# Altium PCB PCB1.PcbDoc (part 4 of 4)
Units mm, origin at the board's own origin, x right, y up, seen from the top; angles counter-clockwise.
Board outline 120 x 70 mm, 6 copper layers (SIG TOP, GND1, PWR, SIG, GND2, SIG BOT), stack 1.538 mm thick; 355 components, 304 nets, 1156 pads, 166 vias.
Unrouted connection lines stored in the file: 534.
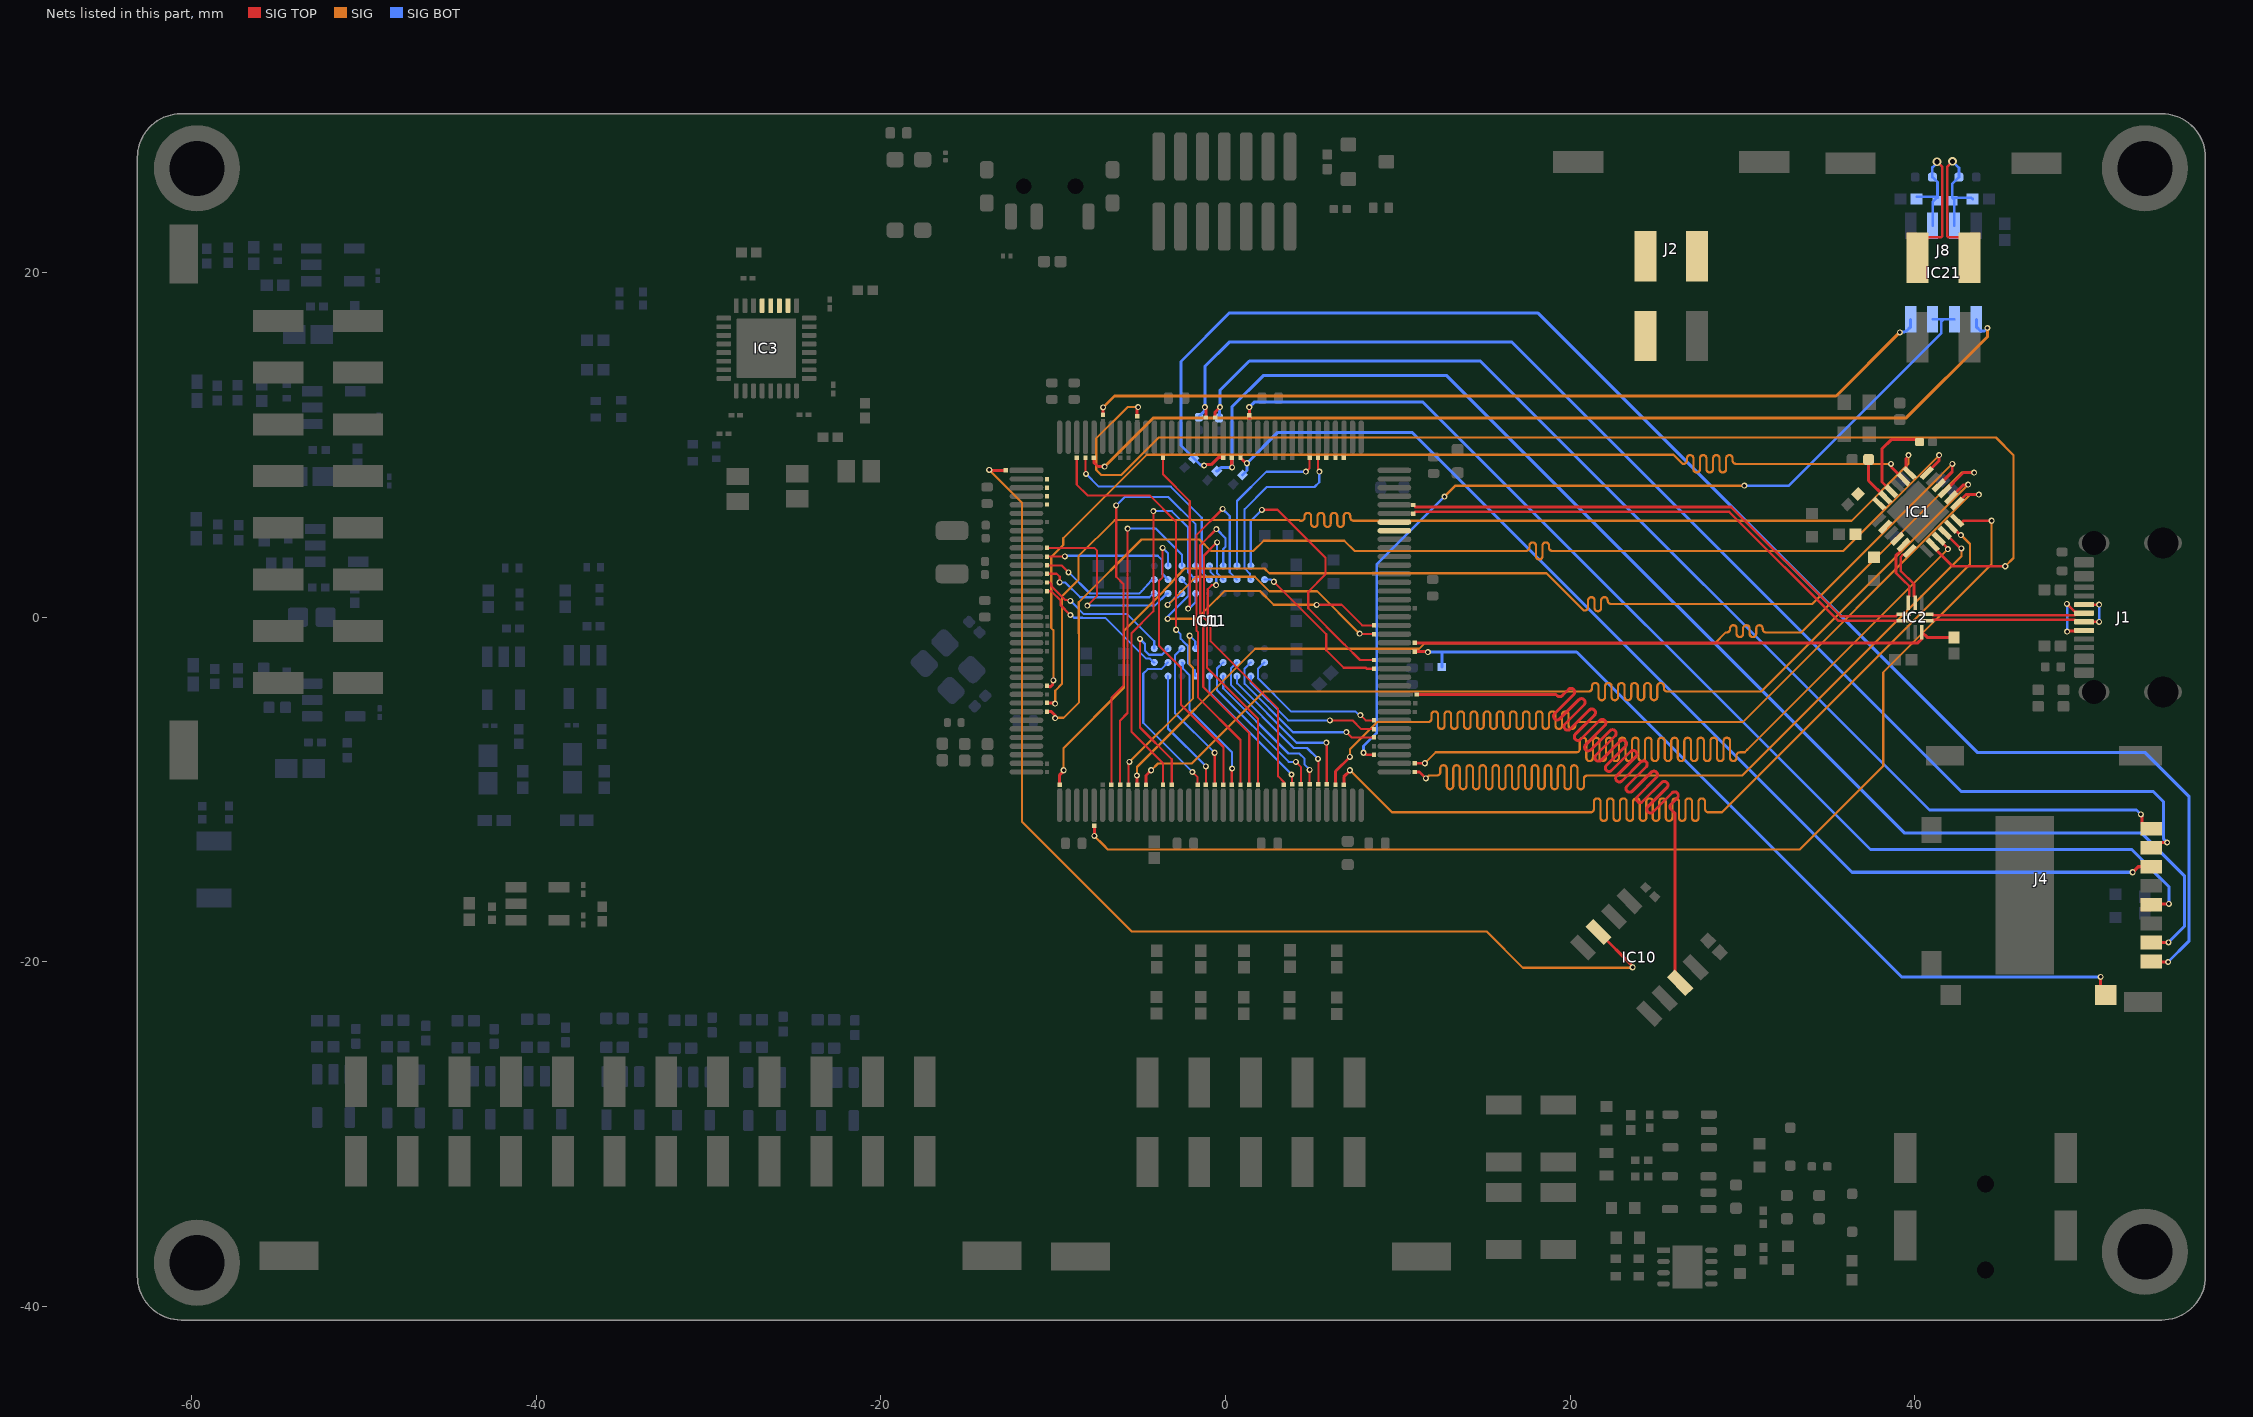
[diagram p6: the nets of this part, all layers, seen from the top]

## Via types
v1: diameter 0.35, hole 0.2, SIG TOP to SIG BOT, tented both sides, 131 vias
v2: diameter 0.5, hole 0.3, SIG TOP to SIG BOT, tented both sides, 22 vias
v3: diameter 0.5, hole 0.2, SIG TOP to SIG BOT, 9 vias
v4: diameter 0.5, hole 0.25, SIG TOP to SIG BOT, tented both sides, 1 vias
v5: diameter 0.4, hole 0.25, SIG TOP to SIG BOT, tented both sides, 1 vias
v6: diameter 0.35, hole 0.2, SIG TOP to SIG BOT, 1 vias
v7: diameter 0.4, hole 0.2, SIG TOP to SIG BOT, tented both sides, 1 vias

## Nets (pads, with @x,y where several pads share a name; then routed paths per layer and width w, separated by ;. In a path a pad name is that pad's centre, name@x,y a point inside that pad or via, vN(x,y) a via of type N, cw(c..) or ccw(c..) an arc to the next point about the centre after c; other vN are vias at no path point) (continued)
QSPI_IO2: IC10.3 NT7.1 | length 64
  SIG TOP w0.171: IC10.3@21.64,-18.279 23.622,-20.262 v1(23.622,-20.32)
  SIG TOP w0.175: v1(-13.716,8.534) -13.691,8.509 NT7.1@-12.751,8.509
  SIG w0.125: v1(-13.716,8.534) -12.831,7.649 -11.811,6.629 -11.811,-11.887 -5.461,-18.237 15.138,-18.237 17.247,-20.345 v1@23.622,-20.345
QSPI_IO3: IC10.7 NT9.1 | length 65.4
  SIG TOP w0.171: NT9.1@11.1,-4.496 19.177,-4.496 19.237,-4.556 ccw(c19.387,-4.406) 19.538,-4.556 19.896,-4.197 cw(c20.046,-4.348) 20.197,-4.197 cw(c20.046,-4.348) 20.197,-4.498 19.092,-5.602 ccw(c19.243,-5.752) 19.092,-5.902 ccw(c19.243,-5.752) 19.393,-5.902 20.497,-4.798 cw(c20.647,-4.948) 20.797,-4.798 cw(c20.647,-4.948) 20.797,-5.098 19.693,-6.202 ccw(c19.843,-6.353) 19.693,-6.503 ccw(c19.843,-6.353) 19.993,-6.503 21.097,-5.399 cw(c21.248,-5.549) 21.398,-5.399 cw(c21.248,-5.549) 21.398,-5.699 20.294,-6.803 ccw(c20.444,-6.953) 20.294,-7.103 ccw(c20.444,-6.953) 20.594,-7.103 21.698,-5.999 cw(c21.848,-6.149) 21.998,-5.999 cw(c21.848,-6.149) 21.998,-6.299 20.894,-7.404 ccw(c21.044,-7.554) 20.894,-7.704 ccw(c21.044,-7.554) 21.194,-7.704 22.298,-6.6 cw(c22.449,-6.75) 22.599,-6.6 cw(c22.449,-6.75) 22.599,-6.9 21.495,-8.004 ccw(c21.645,-8.154) 21.495,-8.304 ccw(c21.645,-8.154) 21.795,-8.304 22.899,-7.2 cw(c23.049,-7.35) 23.199,-7.2 cw(c23.049,-7.35) 23.199,-7.5 22.095,-8.605 ccw(c22.245,-8.755) 22.095,-8.905 ccw(c22.245,-8.755) 22.395,-8.905 23.5,-7.801 cw(c23.65,-7.951) 23.8,-7.801 cw(c23.65,-7.951) 23.8,-8.101 22.696,-9.205 ccw(c22.846,-9.355) 22.696,-9.505 ccw(c22.846,-9.355) 22.996,-9.505 24.1,-8.401 cw(c24.25,-8.551) 24.4,-8.401 cw(c24.25,-8.551) 24.4,-8.702 23.296,-9.806 ccw(c23.446,-9.956) 23.296,-10.106 ccw(c23.446,-9.956) 23.597,-10.106 24.701,-9.002 cw(c24.851,-9.152) 25.001,-9.002 cw(c24.851,-9.152) 25.001,-9.302 23.897,-10.406 ccw(c24.047,-10.556) 23.897,-10.707 ccw(c24.047,-10.556) 24.197,-10.707 25.301,-9.602 cw(c25.451,-9.752) 25.601,-9.602 cw(c25.451,-9.752) 25.601,-9.903 24.497,-11.007 ccw(c24.647,-11.157) 24.497,-11.307 ccw(c24.647,-11.157) 24.798,-11.307 25.902,-10.203 cw(c26.052,-10.353) 26.202,-10.203 cw(c26.052,-10.353) 26.202,-10.503 25.843,-10.862 ccw(c25.993,-11.012) 25.843,-11.162 26.064,-11.382 26.064,-11.532 26.064,-20.907 IC10.7@26.373,-21.217
RAM_A0: IC11.H7 NT3.1 | length 11.4
  SIG TOP w0.125: NT3.1@-10.363,4.013 -7.62,4.013 -7.458,3.851 -7.458,1.229 v1(-8.026,0.66)
  SIG BOT w0.125: v1(-8.026,0.66) -4.115,0.66 -3.405,1.371 IC11.H7@-3.34,1.371
RAM_A1: IC11.H8 NT6.1 | length 8.1
  SIG TOP w0.125: NT6.1@-10.363,3.505 -9.349,3.505 v1(-9.332,3.522)
  SIG BOT w0.125: v1(-9.332,3.522) -9.298,3.556 -3.937,3.556 -3.696,3.315 -3.696,2.528 IC11.H8@-3.34,2.171
RAM_A2: IC11.J8 NT8.1 | length 7.2
  SIG TOP w0.125: NT8.1@-10.363,2.997 -9.525,2.997 v1(-9.119,2.591)
  SIG BOT w0.125: v1(-9.119,2.591) -9.093,2.591 -7.868,1.366 -5.009,1.366 -4.87,1.505 -4.302,2.133 -4.271,2.164 IC11.J8@-4.14,2.171
RAM_A3: IC11.J7 NT10.1 | length 7.1
  SIG TOP w0.125: NT10.1@-10.363,2.515 -9.804,2.515 -9.629,2.339 v1(-9.629,2.008)
  SIG BOT w0.125: v1(-9.629,2.008) -9.297,2.008 -8.442,1.152 -4.425,1.152 -4.206,1.371 IC11.J7@-4.14,1.371
RAM_A4: IC11.J3 NT12.1 | length 8.1
  SIG TOP w0.125: NT12.1@-10.363,2.007 -10.202,2.007 -10.121,1.925 -10.121,1.804 -9.303,0.986 -9.046,0.986 v1(-9.003,0.943)
  SIG BOT w0.125: v1(-9.003,0.943) v1(-9.003,0.943) -8.23,0.169 -5.713,0.169 -4.14,-1.404 IC11.J3@-4.14,-1.829
RAM_A5: IC11.J2 NT16.1 | length 8.1
  SIG TOP w0.125: NT16.1@-10.363,1.499 -10.118,1.499 -9.585,0.966 -9.585,0.694 v1(-9.01,0.119)
  SIG BOT w0.125: v1(-9.01,0.119) -8.949,0.119 -8.786,-0.044 -8.32,-0.044 -8.319,-0.045 -6.981,-0.045 -4.627,-2.399 -4.415,-2.399 -4.185,-2.629 IC11.J2@-4.14,-2.629
RAM_A6: IC11.H3 NT19.1 | length 11.6
  SIG TOP w0.125: v1(-4.969,-1.27) -4.969,-6.41 -3.124,-8.255 NT19.1@-3.124,-9.728
  SIG BOT w0.125: v1(-4.969,-1.27) -4.675,-1.564 -4.675,-1.954 -4.444,-2.185 -3.696,-2.185 IC11.H3@-3.34,-1.829
RAM_A7: IC11.H2 NT22.1 | length 9.5
  SIG TOP w0.125: v1(-1.93,-8.992) -1.626,-9.296 NT22.1@-1.626,-9.728
  SIG BOT w0.125: IC11.H2@-3.34,-2.629 -3.734,-3.023 -4.521,-3.023 -4.775,-3.277 -4.775,-6.133 -1.93,-8.978 v1(-1.93,-8.992)
RAM_A8: IC11.H1 NT25.1 | length 7.2
  SIG TOP w0.125: NT25.1@-1.143,-9.728 v1(-1.143,-8.661)
  SIG BOT w0.125: IC11.H1@-3.34,-3.429 -3.34,-6.464 v1(-1.143,-8.661)
RAM_A9: IC11.G3 NT28.1 | length 9
  SIG TOP w0.125: NT28.1@-0.635,-9.728 v1(-0.635,-7.874)
  SIG BOT w0.125: IC11.G3@-2.54,-1.829 -2.946,-2.235 -2.946,-5.563 v1(-0.635,-7.874)
RAM_A10: IC11.H9 NT30.1 | length 16.5
  SIG TOP w0.125: v1(-3.658,4.013) -3.658,2.311 -3.862,2.107 -3.862,-1.675 -2.591,-2.946 -2.591,-5.08 -0.127,-7.544 NT30.1@-0.127,-9.728
  SIG BOT w0.125: v1(-3.658,4.013) -3.34,3.696 IC11.H9@-3.34,2.971
RAM_A11: IC11.G2 NT33.1 | length 8.3
  SIG TOP w0.125: NT33.1@0.356,-9.728 0.356,-8.805 v1(0.372,-8.788)
  SIG BOT w0.125: IC11.G2@-2.54,-2.629 -2.485,-2.683 -2.485,-2.979 -2.096,-3.368 -2.096,-5.382 0.38,-7.858 0.38,-8.781 v1(0.372,-8.788)
RAM_BA0: IC11.G7 NT46.1 | length 15.1
  SIG TOP w0.125: v1(7.772,-0.965) 7.798,-0.991 NT46.1@8.611,-0.991
  SIG w0.125: v1(-3.371,0.71) -3.33,0.71 -1.698,2.342 1.697,2.342 2.54,1.499 5.309,1.499 v1(7.772,-0.965)
  SIG BOT w0.125: v1(-3.371,0.71) -2.952,1.128 -2.783,1.128 IC11.G7@-2.54,1.371
RAM_BA1: IC11.G8 NT50.1 | length 16.4
  SIG TOP w0.125: v1(5.283,0.711) 6.731,0.711 7.925,-0.483 NT50.1@8.611,-0.483
  SIG w0.125: v1(-3.371,-0.102) -1.673,-0.102 -1.041,0.531 -0.057,1.515 1.99,1.515 2.794,0.711 v1(5.283,0.711)
  SIG BOT w0.125: v1(-3.371,-0.102) -3.328,-0.059 -3.328,0.058 -2.159,1.226 -2.159,1.79 IC11.G8@-2.54,2.171
RAM_CKE: IC11.F3 NT55.1 | length 11.2
  SIG TOP w0.125: NT55.1@-5.639,-9.728 -5.639,-8.519 -5.588,-8.468 v1(-5.588,-8.407)
  SIG w0.125: v1(-5.588,-8.407) -1.884,-4.703 -1.884,-2.955 -2.089,-2.75 v1(-2.089,-1.086)
  SIG BOT w0.125: v1(-2.089,-1.086) -1.763,-1.411 -1.763,-1.806 IC11.F3@-1.74,-1.829
RAM_D0: IC11.A8 NT71.1 | length 9
  SIG TOP w0.125: v1(2.794,2.048) 5.842,-1 5.842,-1.93 6.858,-2.946 8.128,-2.946 8.179,-2.997 NT71.1@8.611,-2.997
  SIG BOT w0.125: IC11.A8@2.26,2.171 2.616,2.171 2.739,2.048 v1(2.794,2.048)
RAM_D1: IC11.B9 NT72.1 | length 16.8
  SIG TOP w0.125: v1(2.108,6.223) 3.011,6.223 5.799,3.435 5.799,2.475 4.792,1.468 4.792,0.508 6.899,-1.6 6.909,-1.6 7.798,-2.489 NT72.1@8.611,-2.489
  SIG BOT w0.125: IC11.B9@1.46,2.971 1.46,5.575 v1(2.108,6.223)
RAM_D2: IC11.B8 NT74.1 | length 10.7
  SIG TOP w0.125: NT74.1@5.359,9.246 5.359,8.57 5.436,8.494 v1(5.436,8.433)
  SIG BOT w0.125: IC11.B8@1.46,2.171 1.405,2.226 1.405,2.522 1.104,2.824 1.104,6.26 2.388,7.544 5.156,7.544 5.436,7.823 v1(5.436,8.433)
RAM_D3: IC11.C9 NT76.1 | length 9.4
  SIG TOP w0.125: v1(4.661,8.433) 4.877,8.649 NT76.1@4.877,9.246
  SIG BOT w0.125: IC11.C9@0.66,2.971 0.66,6.731 2.362,8.433 v1(4.661,8.433)
RAM_D4: IC11.C8 NT78.1 | length 22.1
  SIG TOP w0.125: v1(-0.178,6.274) -1.683,4.769 -1.683,-0.797 -1.597,-0.882 -1.597,-4.677 0.864,-7.137 NT78.1@0.864,-9.728
  SIG BOT w0.125: v1(-0.178,6.274) 0.235,5.861 0.235,2.596 IC11.C8@0.66,2.171
RAM_D5: IC11.D9 NT79.1 | length 18.8
  SIG TOP w0.125: v1(-0.533,5.105) -1.469,4.17 -1.469,-0.334 -1.299,-0.504 -1.299,-4.06 1.372,-6.731 NT79.1@1.372,-9.728
  SIG BOT w0.125: v1(-0.533,5.105) -0.005,4.577 -0.005,4.087 -0.14,3.952 IC11.D9@-0.14,2.971
RAM_D6: IC11.D8 NT80.1 | length 18
  SIG TOP w0.125: v1(-0.496,4.331) -1.255,3.573 -1.255,-0.027 -1.085,-0.197 -1.085,-2.943 1.88,-5.908 NT80.1@1.88,-9.728
  SIG BOT w0.125: v1(-0.496,4.331) -0.496,2.534 -0.14,2.178 IC11.D8@-0.14,2.171
RAM_D7: IC11.E9 NT81.1 | length 15.1
  SIG TOP w0.125: v1(-0.547,1.851) -0.809,1.851 -1.041,1.619 -1.041,0.062 -0.871,-0.108 -0.871,-1.403 3.048,-5.322 3.048,-9.246 3.378,-9.576 NT81.1@3.378,-9.728
  SIG BOT w0.125: IC11.E9@-0.94,2.971 -0.885,2.917 -0.885,2.621 -0.547,2.283 v1(-0.547,1.851)
RAM_D8: IC11.E1 NT82.1 | length 8.3
  SIG TOP w0.125: v1(3.823,-9.137) 3.861,-9.175 NT82.1@3.861,-9.703
  SIG BOT w0.125: IC11.E1@-0.94,-3.429 -0.94,-4.355 3.823,-9.118 v1(3.823,-9.137)
RAM_D9: IC11.D2 NT83.1 | length 9.5
  SIG TOP w0.125: v1(4.078,-8.405) 4.081,-8.405 4.369,-8.694 NT83.1@4.369,-9.703
  SIG BOT w0.125: IC11.D2@-0.14,-2.629 -0.496,-2.985 -0.496,-4.253 3.656,-8.405 v1(4.078,-8.405)
RAM_D10: IC11.D1 NT84.1 | length 8.7
  SIG TOP w0.125: NT84.1@4.877,-9.703 v1(4.877,-8.865)
  SIG BOT w0.125: IC11.D1@-0.14,-3.429 -0.14,-4.127 3.647,-7.914 4.281,-7.914 4.569,-8.202 4.569,-8.539 4.877,-8.847 v1(4.877,-8.865)
RAM_D11: IC11.C2 NT85.1 | length 9.8
  SIG TOP w0.125: v1(5.359,-8.23) 5.385,-8.255 NT85.1@5.385,-9.703
  SIG BOT w0.125: IC11.C2@0.66,-2.629 0.304,-2.985 0.304,-3.936 3.962,-7.595 4.724,-7.595 v1(5.359,-8.23)
RAM_D12: IC11.C1 NT86.1 | length 9.4
  SIG TOP w0.125: v1(5.842,-7.29) 5.867,-7.315 NT86.1@5.867,-9.703
  SIG BOT w0.125: IC11.C1@0.66,-3.429 0.665,-3.434 0.665,-3.84 4.115,-7.29 v1(5.842,-7.29)
RAM_D13: IC11.B2 NT87.1 | length 10.2
  SIG TOP w0.125: v1(7.01,-6.68) 7.315,-6.985 NT87.1@8.611,-6.985
  SIG BOT w0.125: IC11.B2@1.46,-2.629 1.104,-2.985 1.104,-3.872 3.912,-6.68 v1(7.01,-6.68)
RAM_D14: IC11.B1 NT88.1 | length 8.7
  SIG TOP w0.125: v1(6.045,-5.994) 7.366,-5.994 7.874,-6.502 NT88.1@8.611,-6.502
  SIG BOT w0.125: IC11.B1@1.46,-3.429 1.46,-3.822 3.632,-5.994 v1(6.045,-5.994)
RAM_D15: IC11.A2 NT89.1 | length 8.8
  SIG TOP w0.125: v1(7.823,-5.69) 8.128,-5.994 NT89.1@8.611,-5.994
  SIG BOT w0.125: IC11.A2@2.26,-2.629 1.88,-3.009 1.88,-3.552 3.814,-5.486 7.544,-5.486 7.747,-5.69 v1(7.823,-5.69)
RAM_DMH: IC11.F1 NT91.1 | length 17.6
  SIG TOP w0.125: NT91.1@-8.636,9.246 -8.636,7.685 -8.012,7.061 -4.41,7.061 -2.879,5.53 -2.879,-0.728 v1(-2.87,-0.737)
  SIG BOT w0.125: v1(-2.87,-0.737) -2.612,-0.995 -2.612,-1.257 -2.397,-1.472 -2.392,-1.472 -2.184,-1.681 -2.184,-2.689 -1.795,-3.078 -1.795,-3.374 IC11.F1@-1.74,-3.429
RAM_DML: IC11.E8 NT90.1 | length 12.5
  SIG TOP w0.125: NT90.1@-8.128,9.246 -8.128,8.331 v1(-8.103,8.306)
  SIG BOT w0.125: v1(-8.103,8.306) -7.366,7.569 -3.184,7.569 -1.384,5.769 -1.384,2.615 IC11.E8@-0.94,2.171
RAM_NCAS: IC11.F7 NT65.1 | length 10.5
  SIG TOP w0.125: NT65.1@-3.632,9.246 -3.632,8.278 -2.079,6.725 -2.079,0.64 -2.174,0.544 v1(-2.174,0.483)
  SIG BOT w0.125: v1(-2.174,0.483) -2.127,0.483 -1.74,0.87 IC11.F7@-1.74,1.371
RAM_NCS: IC11.G9 NT58.1 | length 19.5
  SIG TOP w0.125: NT58.1@-6.121,-9.728 -6.121,-6.004 -5.69,-5.572 v1(-5.69,5.131)
  SIG BOT w0.125: v1(-5.69,5.131) -4.043,5.131 -2.54,3.628 IC11.G9@-2.54,2.971
RAM_NRAS: IC11.F8 NT62.1 | length 22.8
  SIG TOP w0.125: v1(-4.191,6.147) -4.191,0.339 -5.461,-0.931 -5.461,-6.655 -3.632,-8.484 NT62.1@-3.632,-9.728
  SIG BOT w0.125: v1(-4.191,6.147) -3.124,6.147 -2.184,5.206 -2.184,2.615 IC11.F8@-1.74,2.171
RAM_NWE: IC11.F9 NT68.1 | length 24.6
  SIG TOP w0.125: NT68.1@-6.629,-9.728 -6.629,-4.676 -5.935,-3.981 -5.935,1.921 -6.35,2.336 v1(-6.35,6.477)
  SIG BOT w0.125: v1(-6.35,6.477) -5.859,6.968 -3.32,6.968 -1.74,5.388 IC11.F9@-1.74,2.971
RS485.UART4_DE: IC21.2 IC21.3 NT77.1 | length 52.4
  SIG TOP w0.149: v1(8.001,-7.874) 8.055,-7.874 8.182,-8.001 NT77.1@8.611,-8.001
  SIG w0.149: v1(12.7,6.985) 13.335,7.62 v1(30.099,7.62)
  SIG BOT w0.149: v1(8.001,-7.874) 8.001,-7.493 8.763,-6.731 8.763,3.048 v1(12.7,6.985) ; v1(30.099,7.62) 32.682,7.62 41.535,16.473 41.535,17.157 41.656,17.278 ; IC21.3@41.021,17.278 41.656,17.278 ; IC21.2@42.291,17.278 41.656,17.278
RS485.UART4_RX: IC21.4 NT75.1 | length 49.7
  SIG TOP w0.175: NT75.1@-7.112,11.735 v1(-7.112,12.164)
  SIG w0.175: v1(-7.112,12.164) -6.449,12.827 35.427,12.827 v1(39.124,16.524)
  SIG BOT w0.175: v1(39.124,16.524) 39.141,16.541 39.401,16.541 39.463,16.603 39.513,16.603 39.751,16.84 IC21.4@39.751,17.278
RS485.UART4_TX: IC21.1 NT73.1 | length 57.1
  SIG TOP w0.175: NT73.1@-7.645,9.246 -7.645,8.97 -7.407,8.732 v1(-7.016,8.732)
  SIG w0.175: v1(-7.016,8.732) -4.191,11.557 39.497,11.557 44.196,16.256 v1(44.196,16.773)
  SIG BOT w0.175: IC21.1@43.561,17.278 43.561,16.84 43.799,16.603 44.031,16.603 44.196,16.768 v1(44.196,16.773)
RS485_D_N: D8.1 IC21.7 J8.3 R78.1 R79.2 | length 12
  SIG TOP w0.149: v2(42.175,26.443) 42.175,26.429 41.863,26.118 41.863,22.111 41.932,22.041 42.594,22.041 42.594,21.971 43.155,21.411 J8.3@43.155,20.853
  SIG BOT w0.149: v2(42.175,26.443) 42.553,26.064 D8.1@42.553,25.527 42.157,25.131 R78.1@42.157,24.333 ; IC21.7@42.291,22.702 42.291,24.199 R78.1@42.157,24.333 ; R79.2@43.34,24.257 43.264,24.333 R78.1@42.157,24.333
RS485_D_P: D7.1 IC21.6 J8.1 R77.1 R78.2 | length 12.1
  SIG TOP w0.149: J8.1@40.155,20.853 40.155,21.411 40.715,21.971 40.715,22.041 41.517,22.041 41.587,22.111 41.587,26.118 41.288,26.416 v2(41.275,26.416)
  SIG BOT w0.149: R77.1@40.099,24.384 41.256,24.384 R78.2@41.307,24.333 ; IC21.6@41.021,22.702 41.021,24.072 41.282,24.333 R78.2@41.307,24.333 ; v2(41.275,26.416) 41.275,26.355 41.013,26.093 D7.1@41.013,25.527 41.307,25.233 R78.2@41.307,24.333
SAI1_FS_A: IC3.3 NT26.1
SAI1_SCK_A: IC3.2 NT13.1
SAI1_SD_A: IC3.4 NT17.1
SAI1_SD_B: IC3.5 NT20.1
SD_CLK: J4.5 NT38.1 | length 67.8
  SIG TOP w0.175: 1.372,11.532 v1(1.372,12.183) ; J4.5@53.706,-16.689 53.758,-16.637 v1(54.737,-16.637)
  SIG BOT w0.175: v1(1.372,12.183) 1.66,12.471 11.455,12.471 37.414,-13.487 52.578,-13.487 53.746,-14.656 54.737,-15.646 v1(54.737,-16.637)
SD_CMD: J4.3 NT36.1 R55.1 | length 65.2
  SIG TOP w0.175: NT36.1@0.864,9.246 1.152,8.957 1.203,8.957 v1(1.237,8.923) ; v1(52.629,-14.808) 52.948,-14.489 J4.3@53.706,-14.489
  SIG BOT w0.175: R55.1@0.976,8.241 1.237,8.501 v1(1.237,8.923) 3.032,10.719 10.82,10.719 36.347,-14.808 v1(52.629,-14.808)
SD_D0: J4.7 NT43.1 R56.1 | length 78.4
  SIG TOP w0.175: NT43.1@0.356,9.246 0.356,8.712 v1(0.381,8.687) ; J4.7@53.706,-18.889 54.695,-18.889 v1(54.712,-18.872)
  SIG BOT w0.175: R56.1@-0.522,8.469 -0.463,8.469 -0.246,8.687 v1(0.381,8.687) 0.381,12.211 2.179,14.009 12.839,14.009 39.37,-12.522 53.137,-12.522 55.626,-15.011 55.626,-17.958 v1(54.712,-18.872)
SD_D1: J4.8 NT47.1 R57.1 | length 90.4
  SIG TOP w0.175: v1(-1.252,8.793) -1.204,8.793 -1.158,8.839 -0.837,8.839 -0.43,9.246 NT47.1@-0.127,9.246 ; J4.8@53.706,-19.989 53.732,-20.015 v1(54.686,-20.015)
  SIG BOT w0.175: v1(-1.252,8.793) -1.285,8.826 -1.463,8.826 -2.591,9.954 -2.591,14.834 0.229,17.653 18.11,17.653 43.612,-7.849 53.34,-7.849 55.89,-10.399 55.89,-18.811 v1(54.686,-20.015)
SD_D2: J4.1 NT31.1 R47.1 | length 68.5
  SIG TOP w0.175: NT31.1@-0.61,11.582 -0.61,11.9 v1(-0.326,12.183) ; v1(53.111,-11.455) 53.111,-11.503 53.173,-11.564 53.173,-11.977 53.486,-12.289 J4.1@53.706,-12.289
  SIG BOT w0.175: R47.1@-0.406,11.627 -0.354,11.68 -0.354,12.156 v1(-0.326,12.183) ; v1@-0.36,12.183 -0.326,12.217 -0.326,13.161 1.372,14.859 14.783,14.859 40.843,-11.201 52.857,-11.201 v1(53.111,-11.455)
SD_D3: J4.2 NT34.1 R54.1 | length 74.4
  SIG TOP w0.175: v1(-1.205,12.183) -1.205,12.136 -1.143,12.074 NT34.1@-1.143,11.608 ; J4.2@53.706,-13.389 54.014,-13.081 v1(54.628,-13.081)
  SIG BOT w0.175: R54.1@-1.549,11.602 -1.549,11.638 -1.238,11.949 -1.238,12.15 v1(-1.205,12.183) ; v1@-1.261,12.24 -1.23,12.24 -1.205,12.264 -1.205,14.543 0.203,15.951 16.612,15.951 42.697,-10.135 53.835,-10.135 54.407,-10.706 54.407,-12.86 v1(54.628,-13.081)
SD_DET: J4.CD1 NT40.1 R58.1 | length 49.7
  SIG TOP w0.175: NT40.1@10.973,-2.007 11.709,-2.007 v1(11.735,-2.032) ; v6(50.775,-20.879) 50.775,-21.627 J4.CD1@51.077,-21.929
  SIG BOT w0.175: v1(11.735,-2.032) 12.542,-2.032 ; R58.1@12.542,-2.896 12.542,-2.032 ; v6(50.775,-20.879) 39.218,-20.879 20.371,-2.032 12.542,-2.032
SPI3_MISO: J2.2 NT57.1
SPI3_MOSI: J2.3 NT59.1
SPI3_SCK: J2.1 NT56.1
UART_RX: U1.102
UART_TX: U1.101
ULPI.ULPI_CLK: IC1.12 NT37.1 | length 67.6
  SIG TOP w0.171: v1(-7.62,-12.7) NT37.1@-7.62,-12.116 ; IC1.12@42.446,5.601 42.588,5.458 42.68,5.458 42.81,5.588 v1(44.45,5.588)
  SIG w0.125: v1(-7.62,-12.7) -7.09,-13.23 -6.833,-13.487 33.309,-13.487 38.155,-8.641 38.155,-3.212 44.45,3.083 v1(44.45,5.588)
ULPI.ULPI_D0: IC1.16 NT15.1 | length 68.2
  SIG TOP w0.171: NT15.1@-9.627,-9.728 -9.627,-9.155 -9.398,-8.927 v1(-9.398,-8.89) ; IC1.16@41.385,7.652 42.164,8.431 v1(42.164,8.89)
  SIG w0.125: v1(-9.398,-8.89) -9.398,-7.595 -5.893,-4.089 -5.893,-0.787 -3.754,1.351 -2.391,2.819 2.261,2.819 2.54,2.54 18.622,2.54 20.781,0.381 20.843,0.381 ccw(c20.843,0.571) 21.033,0.571 21.033,0.965 cw(c21.222,0.965) 21.222,1.154 cw(c21.222,0.965) 21.412,0.965 21.412,0.526 ccw(c21.601,0.526) 21.601,0.336 ccw(c21.601,0.526) 21.791,0.526 21.791,0.965 cw(c21.98,0.965) 21.98,1.154 cw(c21.98,0.965) 22.17,0.965 22.17,0.952 ccw(c22.36,0.952) 22.36,0.762 22.819,0.762 34.036,0.762 40.911,7.637 v1(42.164,8.89)
ULPI.ULPI_D1: IC1.15 NT18.1 | length 61.4
  SIG TOP w0.171: v1(-5.144,-9.194) -5.131,-9.207 NT18.1@-5.131,-9.728 ; IC1.15@41.738,7.298 42.822,8.382 v1(43.434,8.382)
  SIG w0.125: v1(-5.144,-9.194) -5.144,-8.7 1.714,-1.842 11.23,-1.842 11.531,-1.54 28.365,-1.54 29.017,-0.889 29.079,-0.889 ccw(c29.079,-0.699) 29.269,-0.699 29.269,-0.662 cw(c29.458,-0.662) 29.458,-0.472 cw(c29.458,-0.662) 29.648,-0.662 29.648,-0.973 ccw(c29.837,-0.973) 29.837,-1.162 ccw(c29.837,-0.973) 30.027,-0.973 30.027,-0.662 cw(c30.217,-0.662) 30.217,-0.472 cw(c30.217,-0.662) 30.406,-0.662 30.406,-0.973 ccw(c30.596,-0.973) 30.596,-1.162 ccw(c30.596,-0.973) 30.785,-0.973 30.785,-0.662 cw(c30.975,-0.662) 30.975,-0.472 cw(c30.975,-0.662) 31.164,-0.662 31.164,-0.699 ccw(c31.354,-0.699) 31.354,-0.889 31.725,-0.889 33.42,-0.889 42.691,8.382 v1(43.434,8.382)
ULPI.ULPI_D2: IC1.14 NT21.1 | length 65.6
  SIG TOP w0.171: NT21.1@-4.623,-9.728 -4.623,-9.195 v1(-4.318,-8.89) ; IC1.14@42.092,6.945 42.802,7.655 43.053,7.655 v1(43.087,7.689)
  SIG w0.125: v1(-4.318,-8.89) -3.928,-8.5 -1.972,-8.5 2.21,-4.318 21.006,-4.318 21.068,-4.318 ccw(c21.068,-4.128) 21.258,-4.128 21.258,-4.015 cw(c21.447,-4.015) 21.447,-3.825 cw(c21.447,-4.015) 21.637,-4.015 21.637,-4.636 ccw(c21.827,-4.636) 21.827,-4.826 ccw(c21.827,-4.636) 22.016,-4.636 22.016,-4.015 cw(c22.206,-4.015) 22.206,-3.825 cw(c22.206,-4.015) 22.395,-4.015 22.395,-4.636 ccw(c22.585,-4.636) 22.585,-4.826 ccw(c22.585,-4.636) 22.774,-4.636 22.774,-4.015 cw(c22.964,-4.015) 22.964,-3.825 cw(c22.964,-4.015) 23.154,-4.015 23.154,-4.636 ccw(c23.343,-4.636) 23.343,-4.826 ccw(c23.343,-4.636) 23.533,-4.636 23.533,-4.015 cw(c23.722,-4.015) 23.722,-3.825 cw(c23.722,-4.015) 23.912,-4.015 23.912,-4.636 ccw(c24.101,-4.636) 24.101,-4.826 ccw(c24.101,-4.636) 24.291,-4.636 24.291,-4.015 cw(c24.48,-4.015) 24.48,-3.825 cw(c24.48,-4.015) 24.67,-4.015 24.67,-4.636 ccw(c24.86,-4.636) 24.86,-4.826 ccw(c24.86,-4.636) 25.049,-4.636 25.049,-4.015 cw(c25.239,-4.015) 25.239,-3.825 cw(c25.239,-4.015) 25.428,-4.015 25.428,-4.128 ccw(c25.618,-4.128) 25.618,-4.318 26.086,-4.318 31.081,-4.318 v1(43.087,7.689)
ULPI.ULPI_D3: IC1.13 NT24.1 | length 65.2
  SIG TOP w0.171: NT24.1@6.375,-9.728 6.375,-8.953 v1(7.214,-8.115) ; IC1.13@42.446,6.591 42.967,7.112 43.688,7.112 v1(43.702,7.099)
  SIG w0.125: v1(7.214,-8.115) 7.214,-7.671 8.788,-6.096 11.69,-6.096 11.753,-6.096 ccw(c11.753,-5.906) 11.943,-5.906 11.943,-5.664 cw(c12.132,-5.664) 12.132,-5.474 cw(c12.132,-5.664) 12.322,-5.664 12.322,-6.304 ccw(c12.511,-6.304) 12.511,-6.494 ccw(c12.511,-6.304) 12.701,-6.304 12.701,-5.664 cw(c12.89,-5.664) 12.89,-5.474 cw(c12.89,-5.664) 13.08,-5.664 13.08,-6.304 ccw(c13.27,-6.304) 13.27,-6.494 ccw(c13.27,-6.304) 13.459,-6.304 13.459,-5.664 cw(c13.649,-5.664) 13.649,-5.474 cw(c13.649,-5.664) 13.838,-5.664 13.838,-6.304 ccw(c14.028,-6.304) 14.028,-6.494 ccw(c14.028,-6.304) 14.217,-6.304 14.217,-5.664 cw(c14.407,-5.664) 14.407,-5.474 cw(c14.407,-5.664) 14.596,-5.664 14.596,-6.304 ccw(c14.786,-6.304) 14.786,-6.494 ccw(c14.786,-6.304) 14.976,-6.304 14.976,-5.664 cw(c15.165,-5.664) 15.165,-5.474 cw(c15.165,-5.664) 15.355,-5.664 15.355,-6.304 ccw(c15.544,-6.304) 15.544,-6.494 ccw(c15.544,-6.304) 15.734,-6.304 15.734,-5.664 cw(c15.923,-5.664) 15.923,-5.474 cw(c15.923,-5.664) 16.113,-5.664 16.113,-6.304 ccw(c16.303,-6.304) 16.303,-6.494 ccw(c16.303,-6.304) 16.492,-6.304 16.492,-5.664 cw(c16.682,-5.664) 16.682,-5.474 cw(c16.682,-5.664) 16.871,-5.664 16.871,-6.304 ccw(c17.061,-6.304) 17.061,-6.494 ccw(c17.061,-6.304) 17.25,-6.304 17.25,-5.664 cw(c17.44,-5.664) 17.44,-5.474 cw(c17.44,-5.664) 17.629,-5.664 17.629,-6.304 ccw(c17.819,-6.304) 17.819,-6.494 ccw(c17.819,-6.304) 18.009,-6.304 18.009,-5.664 cw(c18.198,-5.664) 18.198,-5.474 cw(c18.198,-5.664) 18.388,-5.664 18.388,-6.304 ccw(c18.577,-6.304) 18.577,-6.494 ccw(c18.577,-6.304) 18.767,-6.304 18.767,-5.664 cw(c18.956,-5.664) 18.956,-5.474 cw(c18.956,-5.664) 19.146,-5.664 19.146,-6.304 ccw(c19.336,-6.304) 19.336,-6.494 ccw(c19.336,-6.304) 19.525,-6.304 19.525,-5.664 cw(c19.715,-5.664) 19.715,-5.474 cw(c19.715,-5.664) 19.904,-5.664 19.904,-6.304 ccw(c20.094,-6.304) 20.094,-6.494 ccw(c20.094,-6.304) 20.283,-6.304 20.283,-6.286 cw(c20.473,-6.286) 20.473,-6.096 21.095,-6.096 29.997,-6.096 43.192,7.099 v1(43.702,7.099)
ULPI.ULPI_D4: IC1.11 NT27.1 | length 66.3
  SIG TOP w0.171: NT27.1@6.858,-9.728 6.858,-9.271 7.214,-8.915 v1(7.214,-8.89) ; IC1.11@42.092,5.247 42.134,5.247 42.624,4.757 v1(42.666,4.757)
  SIG w0.125: v1(7.214,-8.89) 9.652,-11.328 21.12,-11.328 21.183,-11.328 ccw(c21.183,-11.139) 21.372,-11.139 21.372,-10.711 cw(c21.562,-10.711) 21.562,-10.521 cw(c21.562,-10.711) 21.752,-10.711 21.752,-11.642 ccw(c21.941,-11.642) 21.941,-11.831 ccw(c21.941,-11.642) 22.131,-11.642 22.131,-10.711 cw(c22.32,-10.711) 22.32,-10.521 cw(c22.32,-10.711) 22.51,-10.711 22.51,-11.642 ccw(c22.699,-11.642) 22.699,-11.831 ccw(c22.699,-11.642) 22.889,-11.642 22.889,-10.711 cw(c23.079,-10.711) 23.079,-10.521 cw(c23.079,-10.711) 23.268,-10.711 23.268,-11.642 ccw(c23.458,-11.642) 23.458,-11.831 ccw(c23.458,-11.642) 23.647,-11.642 23.647,-10.711 cw(c23.837,-10.711) 23.837,-10.521 cw(c23.837,-10.711) 24.026,-10.711 24.026,-11.642 ccw(c24.216,-11.642) 24.216,-11.831 ccw(c24.216,-11.642) 24.405,-11.642 24.405,-10.711 cw(c24.595,-10.711) 24.595,-10.521 cw(c24.595,-10.711) 24.785,-10.711 24.785,-11.642 ccw(c24.974,-11.642) 24.974,-11.831 ccw(c24.974,-11.642) 25.164,-11.642 25.164,-10.711 cw(c25.353,-10.711) 25.353,-10.521 cw(c25.353,-10.711) 25.543,-10.711 25.543,-11.642 ccw(c25.732,-11.642) 25.732,-11.831 ccw(c25.732,-11.642) 25.922,-11.642 25.922,-10.711 cw(c26.111,-10.711) 26.111,-10.521 cw(c26.111,-10.711) 26.301,-10.711 26.301,-11.642 ccw(c26.491,-11.642) 26.491,-11.831 ccw(c26.491,-11.642) 26.68,-11.642 26.68,-10.711 cw(c26.87,-10.711) 26.87,-10.521 cw(c26.87,-10.711) 27.059,-10.711 27.059,-11.642 ccw(c27.249,-11.642) 27.249,-11.831 ccw(c27.249,-11.642) 27.438,-11.642 27.438,-10.711 cw(c27.628,-10.711) 27.628,-10.521 cw(c27.628,-10.711) 27.818,-10.711 27.818,-11.139 ccw(c28.007,-11.139) 28.007,-11.328 28.502,-11.328 28.804,-11.328 43.189,3.057 43.189,4.235 v1(42.666,4.757)
ULPI.ULPI_D5: IC1.10 NT29.1 | length 66
  SIG TOP w0.171: NT29.1@10.973,-8.992 11.252,-8.992 v1(11.621,-9.36) ; IC1.10@41.738,4.894 41.738,4.882 42.551,4.07 42.561,4.07 42.649,3.983 v1(42.697,3.983)
  SIG w0.125: v1(11.621,-9.36) 11.631,-9.36 11.796,-9.195 12.2,-9.195 12.262,-9.195 ccw(c12.262,-9.005) 12.452,-9.005 12.452,-8.786 cw(c12.641,-8.786) 12.641,-8.596 cw(c12.641,-8.786) 12.831,-8.786 12.831,-9.804 ccw(c13.021,-9.804) 13.021,-9.994 ccw(c13.021,-9.804) 13.21,-9.804 13.21,-8.786 cw(c13.4,-8.786) 13.4,-8.596 cw(c13.4,-8.786) 13.589,-8.786 13.589,-9.804 ccw(c13.779,-9.804) 13.779,-9.994 ccw(c13.779,-9.804) 13.968,-9.804 13.968,-8.786 cw(c14.158,-8.786) 14.158,-8.596 cw(c14.158,-8.786) 14.347,-8.786 14.347,-9.804 ccw(c14.537,-9.804) 14.537,-9.994 ccw(c14.537,-9.804) 14.727,-9.804 14.727,-8.786 cw(c14.916,-8.786) 14.916,-8.596 cw(c14.916,-8.786) 15.106,-8.786 15.106,-9.804 ccw(c15.295,-9.804) 15.295,-9.994 ccw(c15.295,-9.804) 15.485,-9.804 15.485,-8.786 cw(c15.674,-8.786) 15.674,-8.596 cw(c15.674,-8.786) 15.864,-8.786 15.864,-9.804 ccw(c16.054,-9.804) 16.054,-9.994 ccw(c16.054,-9.804) 16.243,-9.804 16.243,-8.786 cw(c16.433,-8.786) 16.433,-8.596 cw(c16.433,-8.786) 16.622,-8.786 16.622,-9.804 ccw(c16.812,-9.804) 16.812,-9.994 ccw(c16.812,-9.804) 17.001,-9.804 17.001,-8.786 cw(c17.191,-8.786) 17.191,-8.596 cw(c17.191,-8.786) 17.38,-8.786 17.38,-9.804 ccw(c17.57,-9.804) 17.57,-9.994 ccw(c17.57,-9.804) 17.76,-9.804 17.76,-8.786 cw(c17.949,-8.786) 17.949,-8.596 cw(c17.949,-8.786) 18.139,-8.786 18.139,-9.804 ccw(c18.328,-9.804) 18.328,-9.994 ccw(c18.328,-9.804) 18.518,-9.804 18.518,-8.786 cw(c18.707,-8.786) 18.707,-8.596 cw(c18.707,-8.786) 18.897,-8.786 18.897,-9.804 ccw(c19.086,-9.804) 19.086,-9.994 ccw(c19.087,-9.804) 19.276,-9.804 19.276,-8.786 cw(c19.466,-8.786) 19.466,-8.596 cw(c19.466,-8.786) 19.655,-8.786 19.655,-9.804 ccw(c19.845,-9.804) 19.845,-9.994 ccw(c19.845,-9.804) 20.034,-9.804 20.034,-8.786 cw(c20.224,-8.786) 20.224,-8.596 cw(c20.224,-8.786) 20.413,-8.786 20.413,-9.804 ccw(c20.603,-9.804) 20.603,-9.994 ccw(c20.603,-9.804) 20.793,-9.804 20.793,-9.384 cw(c20.982,-9.384) 20.982,-9.195 21.252,-9.195 29.97,-9.195 42.697,3.533 v1(42.697,3.983)
ULPI.ULPI_D6: IC1.9 NT32.1 | length 65.4
  SIG TOP w0.171: NT32.1@10.973,-8.484 v1(11.557,-8.484) ; IC1.9@41.385,4.54 41.385,4.505 41.911,3.979 v1(41.911,3.944)
  SIG w0.125: v1(11.557,-8.484) 12.192,-7.849 20.298,-7.849 20.361,-7.849 ccw(c20.361,-7.659) 20.551,-7.659 20.551,-7.189 cw(c20.74,-7.189) 20.74,-6.999 cw(c20.74,-7.189) 20.93,-7.189 20.93,-8.167 ccw(c21.119,-8.167) 21.119,-8.357 ccw(c21.119,-8.167) 21.309,-8.167 21.309,-7.189 cw(c21.498,-7.189) 21.498,-6.999 cw(c21.498,-7.189) 21.688,-7.189 21.688,-8.167 ccw(c21.877,-8.167) 21.877,-8.357 ccw(c21.877,-8.167) 22.067,-8.167 22.067,-7.189 cw(c22.257,-7.189) 22.257,-6.999 cw(c22.257,-7.189) 22.446,-7.189 22.446,-8.167 ccw(c22.636,-8.167) 22.636,-8.357 ccw(c22.636,-8.167) 22.825,-8.167 22.825,-7.189 cw(c23.015,-7.189) 23.015,-6.999 cw(c23.015,-7.189) 23.204,-7.189 23.204,-8.167 ccw(c23.394,-8.167) 23.394,-8.357 ccw(c23.394,-8.167) 23.583,-8.167 23.583,-7.189 cw(c23.773,-7.189) 23.773,-6.999 cw(c23.773,-7.189) 23.963,-7.189 23.963,-8.167 ccw(c24.152,-8.167) 24.152,-8.357 ccw(c24.152,-8.167) 24.342,-8.167 24.342,-7.189 cw(c24.531,-7.189) 24.531,-6.999 cw(c24.531,-7.189) 24.721,-7.189 24.721,-8.167 ccw(c24.91,-8.167) 24.91,-8.357 ; 24.91,-8.357 ccw(c24.91,-8.167) 25.1,-8.167 25.1,-7.189 cw(c25.29,-7.189) 25.29,-6.999 cw(c25.29,-7.189) 25.479,-7.189 25.479,-8.167 ccw(c25.669,-8.167) 25.669,-8.357 ccw(c25.669,-8.167) 25.858,-8.167 25.858,-7.189 cw(c26.048,-7.189) 26.048,-6.999 cw(c26.048,-7.189) 26.237,-7.189 26.237,-8.167 ccw(c26.427,-8.167) 26.427,-8.357 ccw(c26.427,-8.167) 26.616,-8.167 26.616,-7.189 cw(c26.806,-7.189) 26.806,-6.999 cw(c26.806,-7.189) 26.996,-7.189 26.996,-8.167 ccw(c27.185,-8.167) 27.185,-8.357 ccw(c27.185,-8.167) 27.375,-8.167 27.375,-7.189 cw(c27.564,-7.189) 27.564,-6.999 cw(c27.564,-7.189) 27.754,-7.189 27.754,-8.167 ccw(c27.943,-8.167) 27.943,-8.357 ccw(c27.943,-8.167) 28.133,-8.167 28.133,-7.189 cw(c28.323,-7.189) 28.323,-6.999 cw(c28.323,-7.189) 28.512,-7.189 28.512,-8.167 ccw(c28.702,-8.167) 28.702,-8.357 ccw(c28.702,-8.167) 28.891,-8.167 28.891,-7.189 cw(c29.081,-7.189) 29.081,-6.999 cw(c29.081,-7.189) 29.27,-7.189 29.27,-8.167 ccw(c29.46,-8.167) 29.46,-8.357 ccw(c29.46,-8.167) 29.649,-8.167 29.649,-8.038 cw(c29.839,-8.038) 29.839,-7.849 30.118,-7.849 30.268,-7.699 v1(41.911,3.944)
ULPI.ULPI_D7: IC1.8 NT35.1 | length 71.7
  SIG TOP w0.171: NT35.1@-5.132,11.651 -5.132,12.083 -5.08,12.135 v1(-5.08,12.183) ; IC1.8@41.031,4.187 41.031,4.095 42.18,2.946 v7(45.237,2.946)
  SIG w0.125: v1(-5.08,12.183) -5.089,12.192 -5.685,12.192 -7.508,10.369 -7.508,8.528 -7.22,8.24 -6.058,8.24 -3.884,10.414 44.704,10.414 45.72,9.398 45.72,3.429 v7(45.237,2.946)
ULPI.ULPI_DIR: IC1.19 NT42.1 | length 66.2
  SIG TOP w0.171: NT42.1@-10.363,-4.978 -9.984,-4.978 -9.938,-5.025 v1(-9.89,-5.025) ; v1(39.624,9.398) 39.624,9.349 39.476,9.201 39.476,8.571 IC1.19@39.688,8.359
  SIG w0.125: v1(-9.89,-5.025) -9.89,-4.267 -9.504,-3.882 -9.504,1.189 -8.543,2.15 -8.543,3.522 -6.443,5.622 4.295,5.622 4.329,5.588 4.392,5.588 ccw(c4.392,5.778) 4.581,5.778 4.581,5.858 cw(c4.771,5.858) 4.771,6.047 cw(c4.771,5.858) 4.96,5.858 4.96,5.419 ccw(c5.15,5.419) 5.15,5.23 ccw(c5.15,5.419) 5.34,5.419 5.34,5.858 cw(c5.529,5.858) 5.529,6.047 cw(c5.529,5.858) 5.719,5.858 5.719,5.419 ccw(c5.908,5.419) 5.908,5.23 ccw(c5.908,5.419) 6.098,5.419 6.098,5.858 cw(c6.287,5.858) 6.287,6.047 cw(c6.287,5.858) 6.477,5.858 6.477,5.419 ccw(c6.667,5.419) 6.667,5.23 ccw(c6.667,5.419) 6.856,5.419 6.856,5.858 cw(c7.046,5.858) 7.046,6.047 cw(c7.046,5.858) 7.235,5.858 7.235,5.778 ccw(c7.425,5.778) 7.425,5.588 8.395,5.588 36.322,5.588 39.624,8.89 v1(39.624,9.398)
ULPI.ULPI_NXT: IC1.18 NT49.1 | length 66.5
  SIG TOP w0.171: NT49.1@-10.363,-5.486 -10.116,-5.486 -9.872,-5.731 -9.872,-5.842 v1(-9.889,-5.86) ; IC1.18@40.678,8.359 41.402,9.083 v1(41.402,9.398)
  SIG w0.125: v1(-9.889,-5.86) -9.872,-5.842 -9.398,-5.842 -8.5,-4.944 -8.5,-0.961 -8.518,-0.944 -8.518,0.864 -4.877,4.505 -1.519,4.505 -0.854,3.84 1.616,3.84 2.204,4.427 6.889,4.427 7.477,3.84 12.162,3.84 12.167,3.835 17.375,3.835 17.438,3.835 ccw(c17.438,4.025) 17.627,4.025 17.627,4.139 cw(c17.817,4.139) 17.817,4.329 cw(c17.817,4.139) 18.006,4.139 18.006,3.532 ccw(c18.196,3.532) 18.196,3.342 ccw(c18.196,3.532) 18.385,3.532 18.385,4.139 cw(c18.575,4.139) 18.575,4.329 cw(c18.575,4.139) 18.764,4.139 18.764,4.025 ccw(c18.954,4.025) 18.954,3.835 19.497,3.835 35.839,3.835 v1(41.402,9.398)
ULPI.ULPI_STP: IC1.20 NT45.1 | length 66.5
  SIG TOP w0.171: NT45.1@-10.363,-3.988 -10.322,-4.029 -10.233,-4.029 -10.198,-4.064 -10.179,-4.064 -10.03,-3.915 -10.03,-3.712 v1(-9.996,-3.678) ; v1(38.608,8.89) 38.642,8.856 38.642,8.697 IC1.20@39.334,8.005
  SIG w0.125: v1(-9.996,-3.678) -9.996,-0.765 -10.12,-0.641 -10.12,3.481 -9.423,4.178 -9.423,4.572 -4.58,9.415 25.988,9.415 26.513,8.89 26.576,8.89 ccw(c26.576,9.079) 26.765,9.079 26.765,9.209 cw(c26.955,9.209) 26.955,9.398 cw(c26.955,9.209) 27.144,9.209 27.144,8.579 ccw(c27.334,8.579) 27.334,8.389 ccw(c27.334,8.579) 27.523,8.579 27.523,9.209 cw(c27.713,9.209) 27.713,9.398 cw(c27.713,9.209) 27.902,9.209 27.902,8.579 ccw(c28.092,8.579) 28.092,8.389 ccw(c28.092,8.579) 28.281,8.579 28.281,9.209 cw(c28.471,9.209) 28.471,9.398 cw(c28.471,9.209) 28.66,9.209 28.66,8.579 ccw(c28.85,8.579) 28.85,8.389 ccw(c28.85,8.579) 29.039,8.579 29.039,9.209 cw(c29.229,9.209) 29.229,9.398 cw(c29.229,9.209) 29.418,9.209 29.418,9.079 ccw(c29.608,9.079) 29.608,8.89 29.896,8.89 v1(38.608,8.89)
USB_+3V3: C81.1 IC1.4
USB_D_N: IC2.2 J1.A7 J1.B7 | length 12.7
  SIG TOP w0.149: IC2.2@40.655,0.175 40.98,0.175 41.042,0.113 49.276,0.113 49.388,0.225 J1.A7@49.813,0.225 ; v1(48.811,0.767) 49.278,0.3 49.313,0.3 49.353,0.26 J1.A7@49.353,0.225 ; v1(48.831,-0.845) 48.865,-0.81 49.779,-0.81 J1.B7@49.813,-0.775
  SIG BOT w0.149: v1(48.811,0.767) 48.833,0.745 48.833,-0.842 v1(48.831,-0.845)
USB_D_P: IC2.1 J1.A6 J1.B6 | length 12
  SIG TOP w0.149: IC2.1@40.655,-0.225 40.98,-0.225 41.042,-0.163 49.276,-0.163 49.388,-0.275 J1.A6@49.813,-0.275 49.815,-0.277 50.688,-0.277 v1(50.69,-0.279) ; J1.B6@49.813,0.725 49.816,0.722 50.688,0.722 v1(50.69,0.72)
  SIG BOT w0.149: v1(50.69,-0.279) v1(50.69,0.72)
USB_FS_D_N: IC2.6 NT63.1 | length 31.2
  SIG TOP w0.149: NT63.1@10.897,6.502 11.013,6.386 29.335,6.386 35.671,0.05 38.906,0.05 39.03,0.175 IC2.6@39.355,0.175
USB_FS_D_P: IC2.7 NT60.1 | length 31.1
  SIG TOP w0.149: NT60.1@10.897,5.994 11.013,6.11 29.221,6.11 35.557,-0.225 IC2.7@39.355,-0.225
USB_HS_D_N: IC1.5 IC2.4 | length 3.7
  SIG TOP w0.149: IC1.5@39.688,3.833 39.476,3.621 39.317,3.621 39.175,3.479 39.175,3.048 39.175,2.674 39.943,1.906 39.943,1.559 39.943,1.212 40.005,1.15 IC2.4@40.005,0.825
USB_HS_D_P: IC1.6 IC2.5 | length 3.9
  SIG TOP w0.149: IC1.6@39.334,4.187 39.122,3.975 39.122,3.816 38.899,3.593 38.899,3.073 38.899,2.559 39.283,2.175 39.667,1.791 39.667,1.502 39.667,1.212 39.605,1.15 IC2.5@39.605,0.825
USB_NRST: IC1.22 R4.1 | length 5.1
  SIG TOP w0.175: IC1.22@38.627,7.298 38.091,7.834 38.091,9.77 38.617,10.296 40.129,10.296 R4.1@40.265,10.16
USB_PHY_VBUS: IC1.2 R3.2
USB_RBIAS: IC1.24 R7.2
USB_REFCLK_13_MHZ: IC1.23 R6.1 | length 2.6
  SIG TOP w0.175: R6.1@37.305,9.144 37.305,7.913 IC1.23@38.274,6.945
USB_SW: IC2.10 NT70.1 R9.2 | length 31.9
  SIG TOP w0.175: NT70.1@10.973,-1.499 40.163,-1.499 40.392,-1.269 40.392,-0.888 IC2.10@40.417,-0.864 ; IC2.10@40.405,-0.875 40.706,-1.176 R9.2@42.266,-1.176
pads on no net: IC1.1 IC1.7 IC3.27 IC3.28 IC3.29 IC3.30 IC7.3 IC11.E2 IC11.G1 J1.1 J1.2 J1.3 J1.4 J1.A8 J1.B8 J2.4 J2.5 J2.6 J3.1 J3.2 J3.9 J3.10 J3.12 J3.13 J3.14 J5.2 J5.5 J5.6 J6.MP1 J6.MP2 J7.MP1 J7.MP2 J8.2 J8.5 J8.6 J9.16 J9.17 J9.18 S1.MH1 S1.MH2 S1.MP1 S1.MP2 S1.MP3 S1.MP4 U1.110 U1.134 U2.2 U2.7

## Polygon pours and split planes (outlines as drawn)
GND on GND1 "GND_L02_P001" (solid, remove dead copper, pour order 1): -60.579,29.21 ccw(c-60.579,26.67) -63.119,26.67 -63.119,-38.227 ccw(c-60.579,-38.227) -60.579,-40.767 54.356,-40.767 ccw(c54.356,-38.227) 56.896,-38.227 56.896,26.67 ccw(c54.356,26.67) 54.356,29.21 -53.721,29.21
GND on GND2 "GND_L05_P002" (solid, remove dead copper, pour order 2): -60.579,29.21 ccw(c-60.579,26.67) -63.119,26.67 -63.119,-38.227 ccw(c-60.579,-38.227) -60.579,-40.767 54.356,-40.767 ccw(c54.356,-38.227) 56.896,-38.227 56.896,26.67 ccw(c54.356,26.67) 54.356,29.21 -53.467,29.21

## Other copper
SIG TOP:
  region net +3V3: 25.527,-36.579 24.553,-36.579 cw(c24.553,-36.426) 24.401,-36.426 24.401,-35.69 ccw(c24.299,-35.69) 24.299,-35.588 23.69,-35.588 ccw(c23.69,-35.639) 23.639,-35.639 23.639,-37.493 ccw(c23.715,-37.493) 23.715,-37.569 24.198,-37.569 ccw(c24.198,-37.442) 24.325,-37.442 24.325,-36.985 cw(c24.375,-36.985) 24.375,-36.934 25.527,-36.934
  region net +3V3: 9.855,10.245 ccw(c10.197,8.906) 8.841,8.638 8.832,8.567 ccw(c9.048,8.607) 9.088,8.391 10.713,8.391 ccw(c10.713,8.671) 10.993,8.671 cw(c11.348,8.671) 11.348,9.026 13.558,9.026 ccw(c13.558,9.61) 14.142,9.61 14.142,9.839 ccw(c13.736,9.839) 13.736,10.245
  region net MCU_VDDA: -15.519,-7.747 -13.378,-7.747 cw(c-13.375,-7.747) -13.375,-7.744 -13.375,-7.726 cw(c-13.245,-7.753) -13.251,-7.62 -10.871,-7.609 ccw(c-10.871,-7.308) -10.617,-7.47 -10.617,-6.909 -11.845,-6.858 -13.157,-6.858 -14.757,-6.858 cw(c-14.707,-6.502) -15.062,-6.452 -15.062,-5.969 ccw(c-15.164,-5.969) -15.164,-5.867 -15.443,-5.867 ccw(c-15.443,-5.943) -15.519,-5.944
  region net +5VA: 20.383,-30.988 cw(c20.383,-31.115) 20.511,-31.115 20.511,-33.909 cw(c20.383,-33.909) 20.383,-34.036 15.176,-34.036 cw(c15.176,-33.909) 15.05,-33.909 15.05,-31.115 cw(c15.176,-31.115) 15.176,-30.988
  region net +VCC_FILT: 30.607,-31.496 ccw(c30.607,-31.521) 30.582,-31.521 30.582,-32.207 ccw(c30.607,-32.207) 30.607,-32.233 31.877,-32.233 cw(c31.877,-32.334) 31.979,-32.334 31.979,-33.655 ccw(c32.258,-33.655) 32.258,-33.934 32.893,-33.934 ccw(c32.893,-33.757) 33.071,-33.757 33.071,-32.36 cw(c33.172,-32.36) 33.172,-32.258 34.112,-32.258 ccw(c34.112,-32.106) 34.265,-32.106 34.265,-31.598 ccw(c34.163,-31.598) 34.163,-31.496
  region net +VCC: 35.814,-37.744 ccw(c35.966,-37.744) 35.966,-37.897 40.132,-37.897 ccw(c40.132,-37.719) 40.31,-37.719 40.31,-29.972 ccw(c40.056,-29.972) 40.056,-29.718 38.735,-29.718 ccw(c38.735,-29.845) 38.608,-29.845 38.608,-35.027 cw(c38.354,-35.027) 38.354,-35.281 35.89,-35.281 ccw(c35.89,-35.357) 35.814,-35.357
  region net +VCC_RP: 34.468,-32.614 cw(c33.985,-32.614) 33.985,-33.096 ccw(c33.985,-33.223) 33.858,-33.223 33.858,-33.884 ccw(c34.011,-33.884) 34.011,-34.036 36.957,-34.036 ccw(c36.957,-33.884) 37.109,-33.884 37.109,-32.944 ccw(c36.855,-32.944) 36.855,-32.69 35.458,-32.69 cw(c35.458,-32.512) 35.281,-32.512 35.281,-31.547 ccw(c35.179,-31.547) 35.179,-31.445 34.468,-31.445
SIG BOT:
  region net +3V3: 1.93,3.073 ccw(c2.311,3.073) 2.311,2.692 6.426,2.692 ccw(c6.426,3.073) 6.807,3.073 6.807,3.658 ccw(c6.629,3.658) 6.629,3.835 3.734,3.835 2.769,4.42 2.769,5.105 ccw(c2.718,5.105) 2.718,5.156 1.981,5.156 ccw(c1.981,5.105) 1.93,5.105

## Silkscreen, mask and mechanical layers (free items; w line width, h text height)
Top Overlay:
  text "NoCortex v1.0" at 13.132,-6.811 h4
  text "Josh Valastro" at 22.855,-9.093 h2.5
Board Shape:
  the board outline again, w0.254
Top Component Center:
  lines w0.1: 34.569,-37.414 34.823,-37.414